# Altium PCB PMSM_G474.PcbDoc (part 1 of 2)
Units mm, origin at the board's own origin, x right, y up, seen from the top; angles counter-clockwise.
Board outline 50 x 80 mm, 4 copper layers (Top Layer, GND, VCC, Bottom Layer), stack 0.603 mm thick; 172 components, 95 nets, 535 pads, 281 vias.
Unrouted connection lines stored in the file: 270.
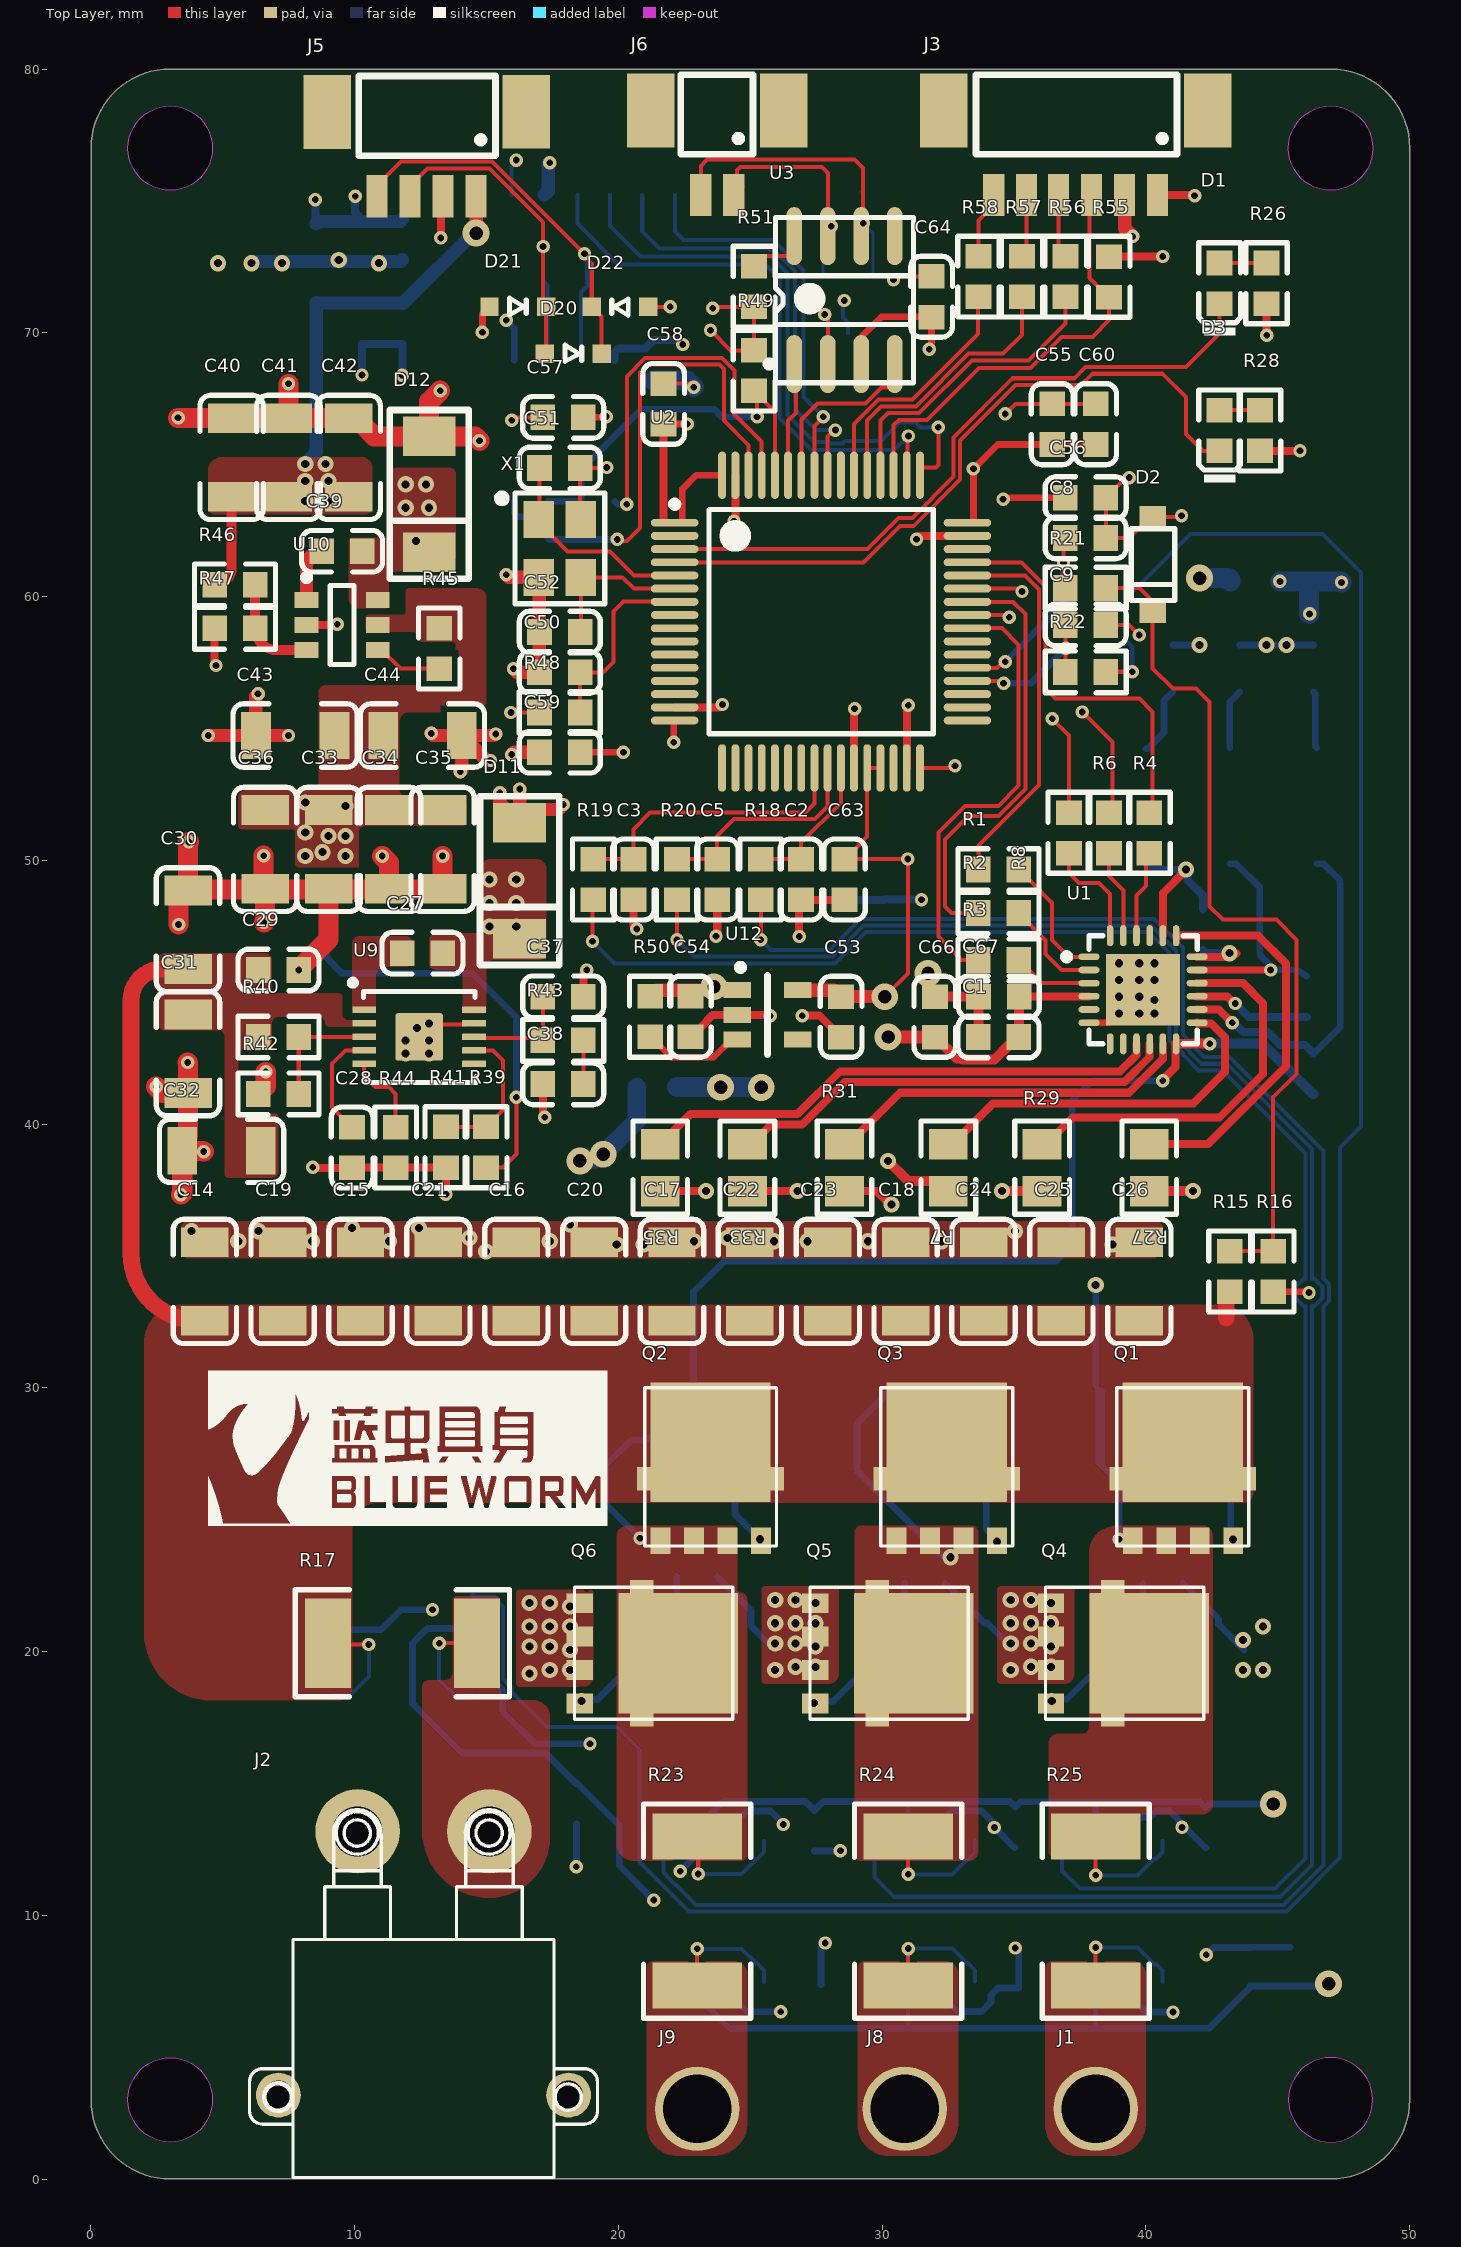
[diagram p0: Top Layer view]
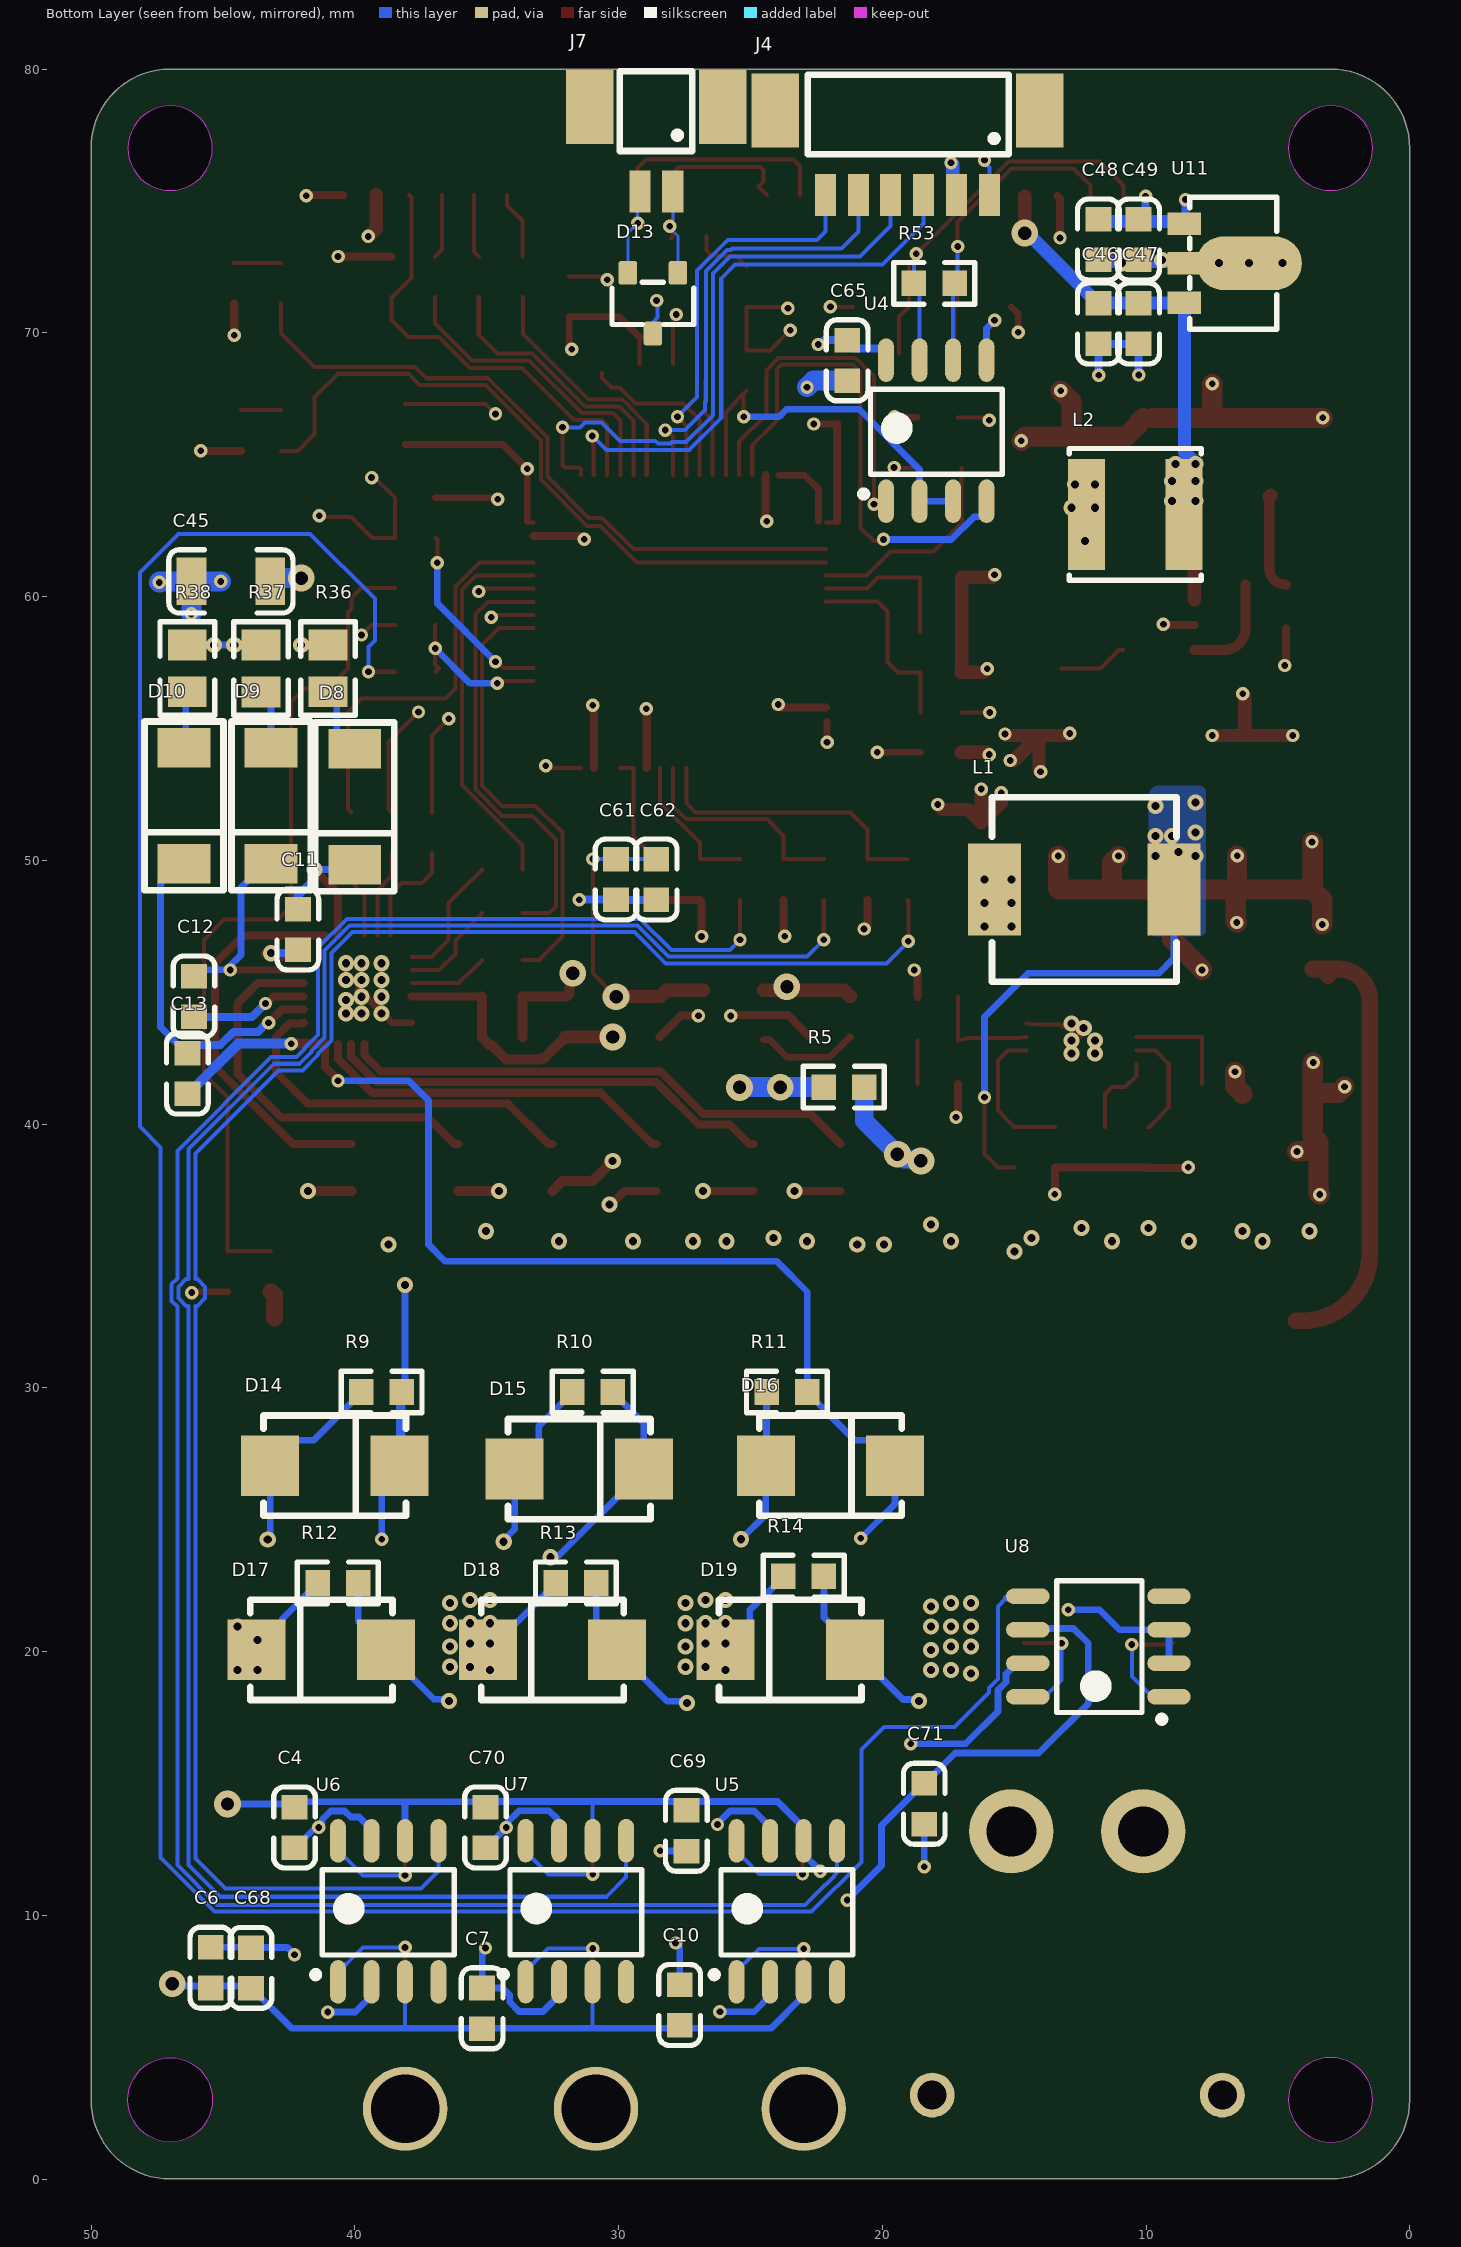
[diagram p1: Bottom Layer view, seen from below]
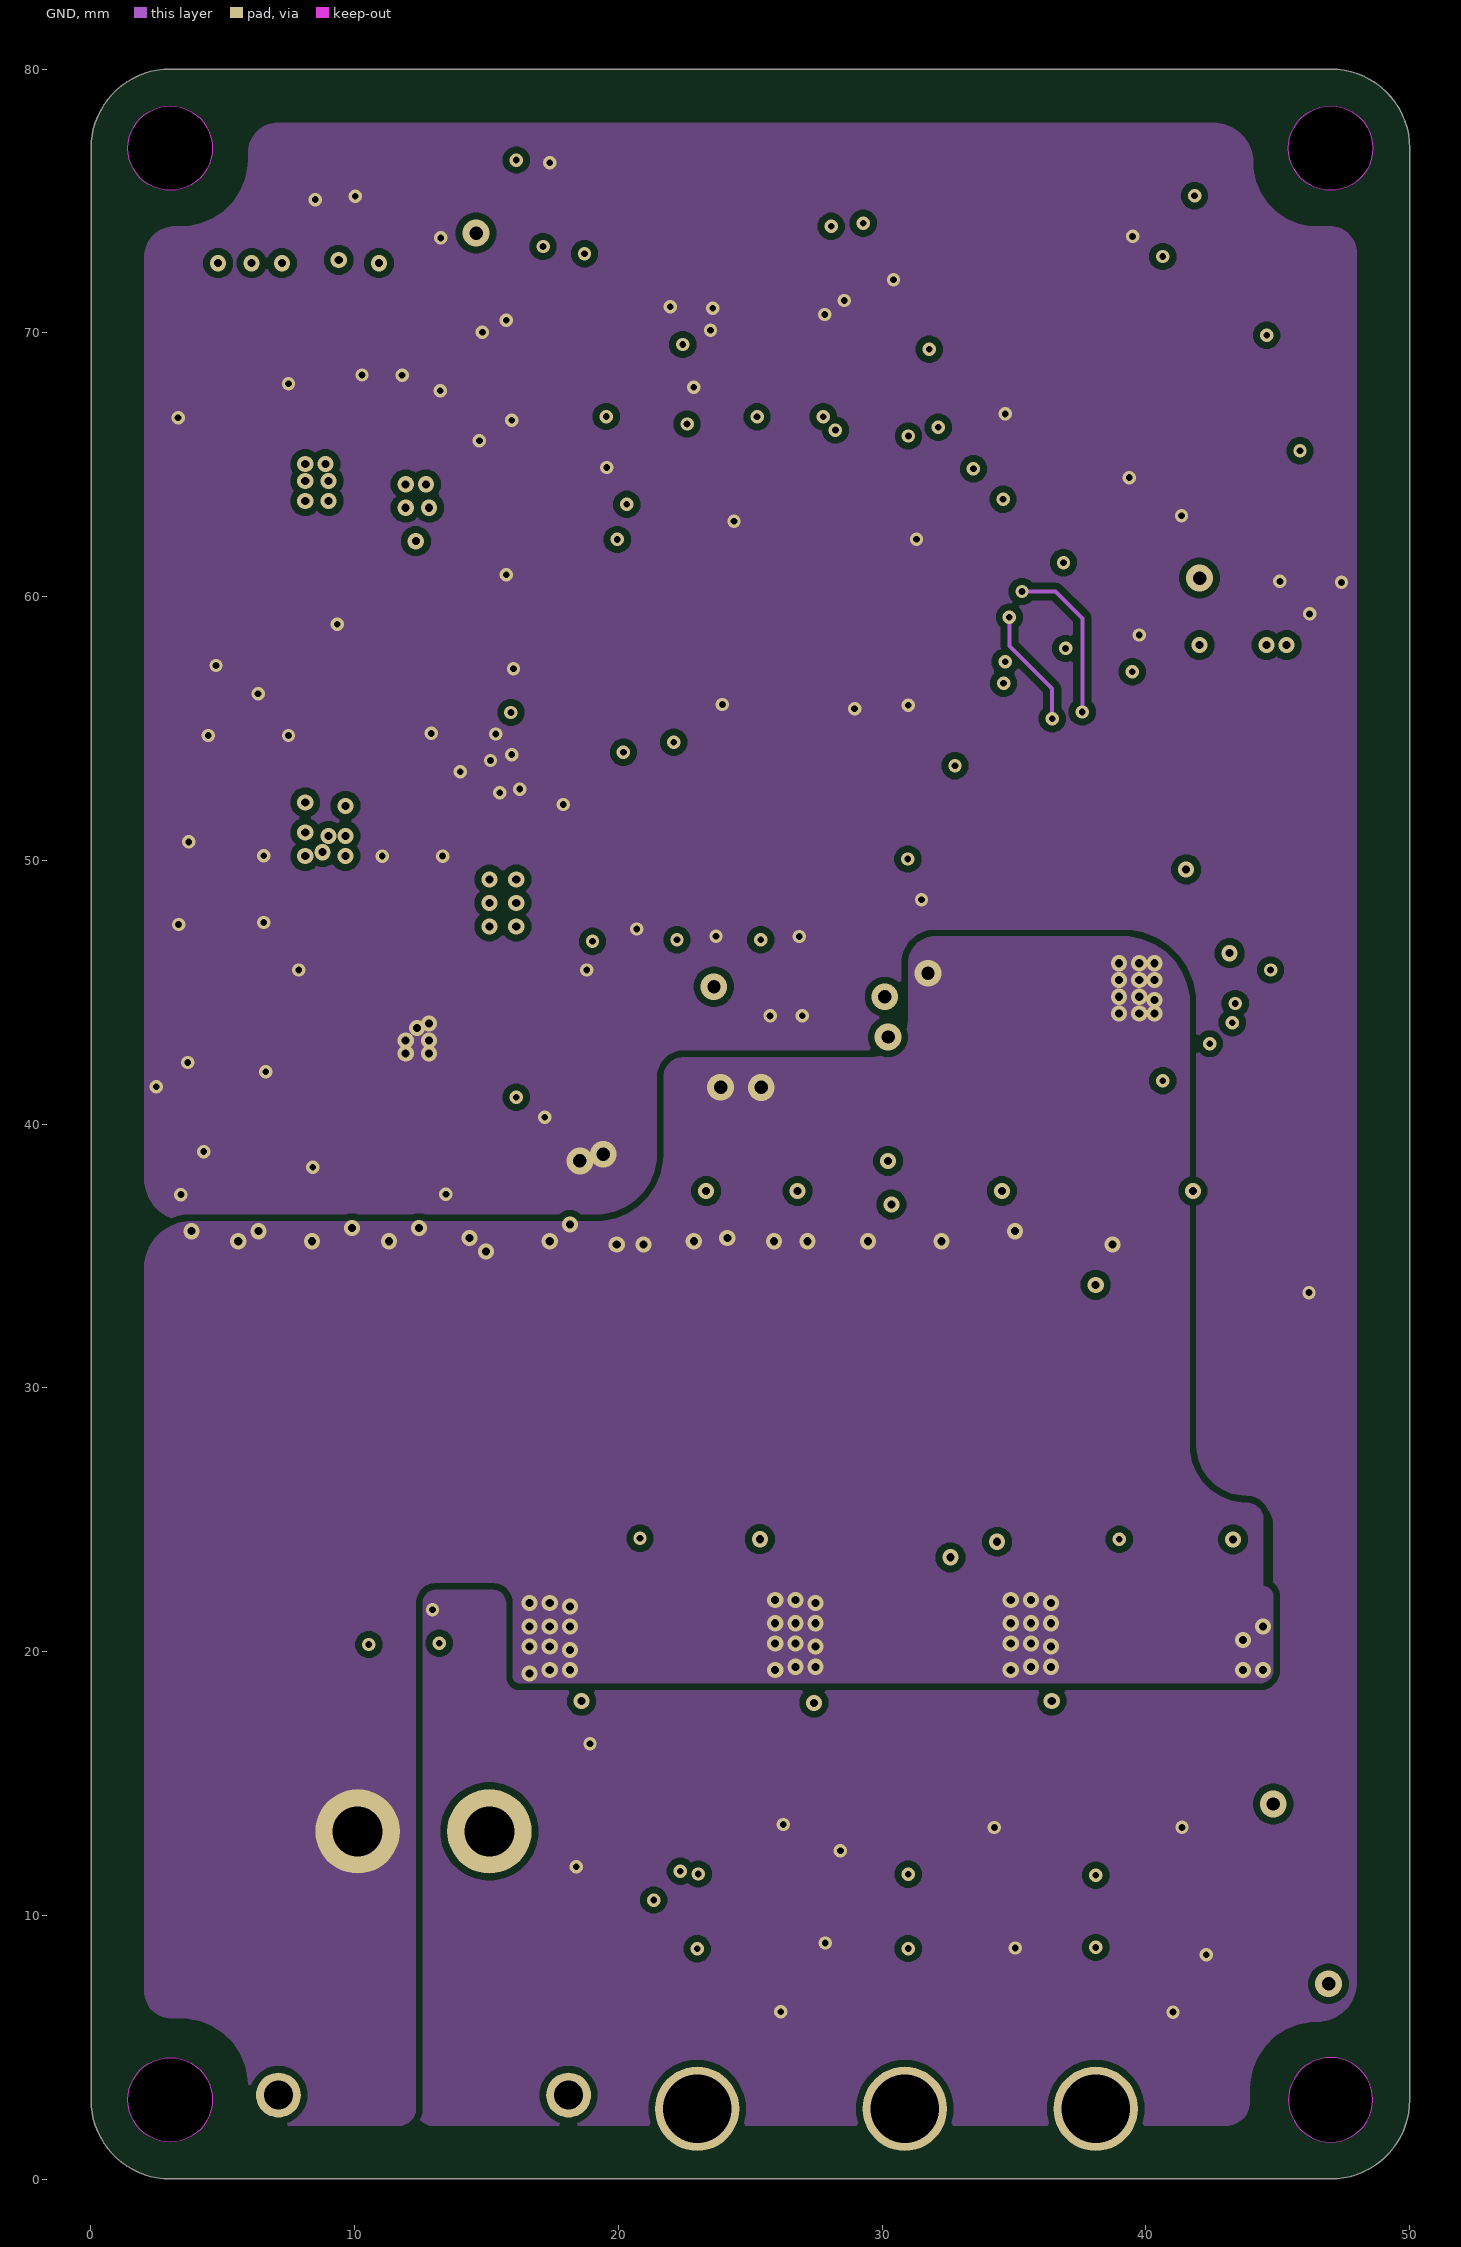
[diagram p2: GND]
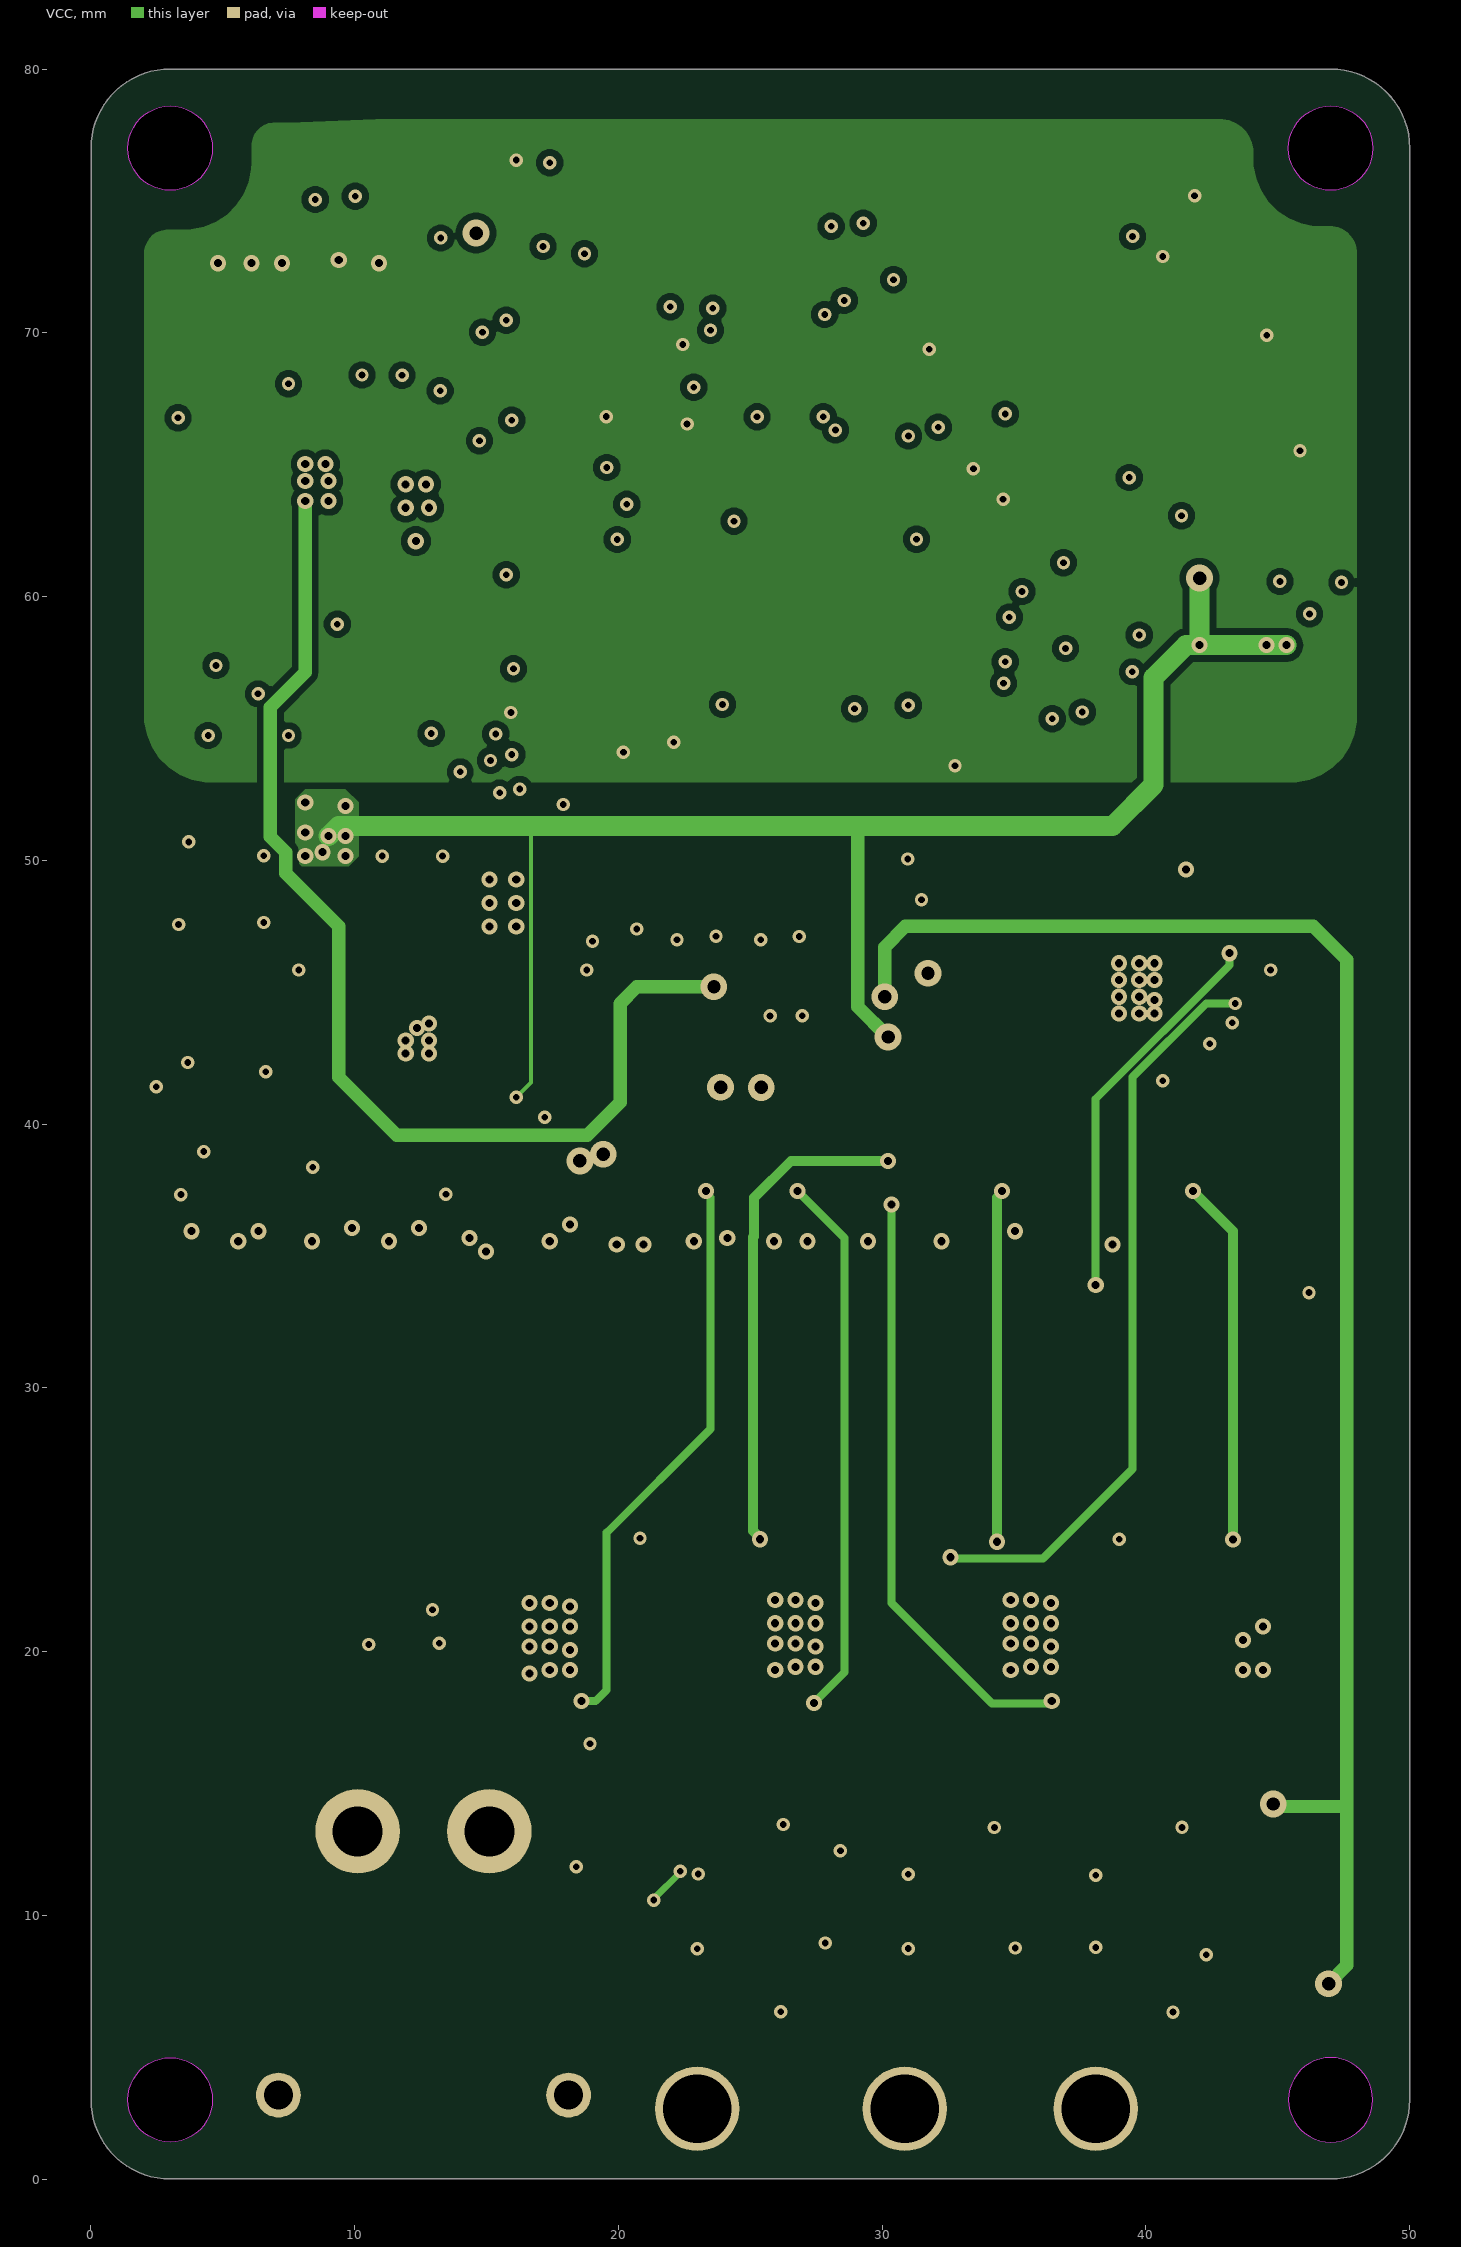
[diagram p3: VCC]
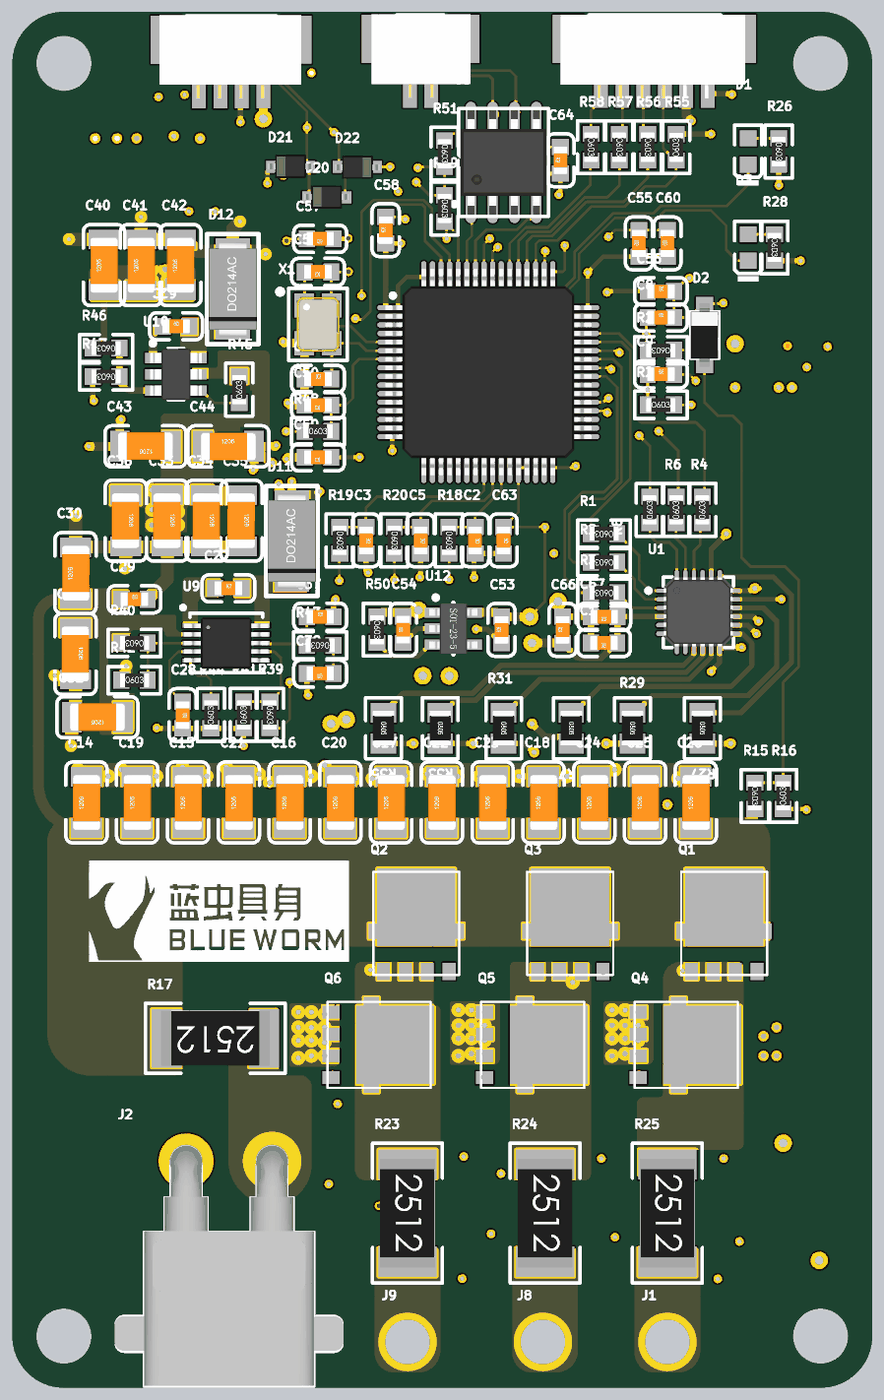
[diagram p5: 3D render of the assembled board from above, using the file's embedded part models]
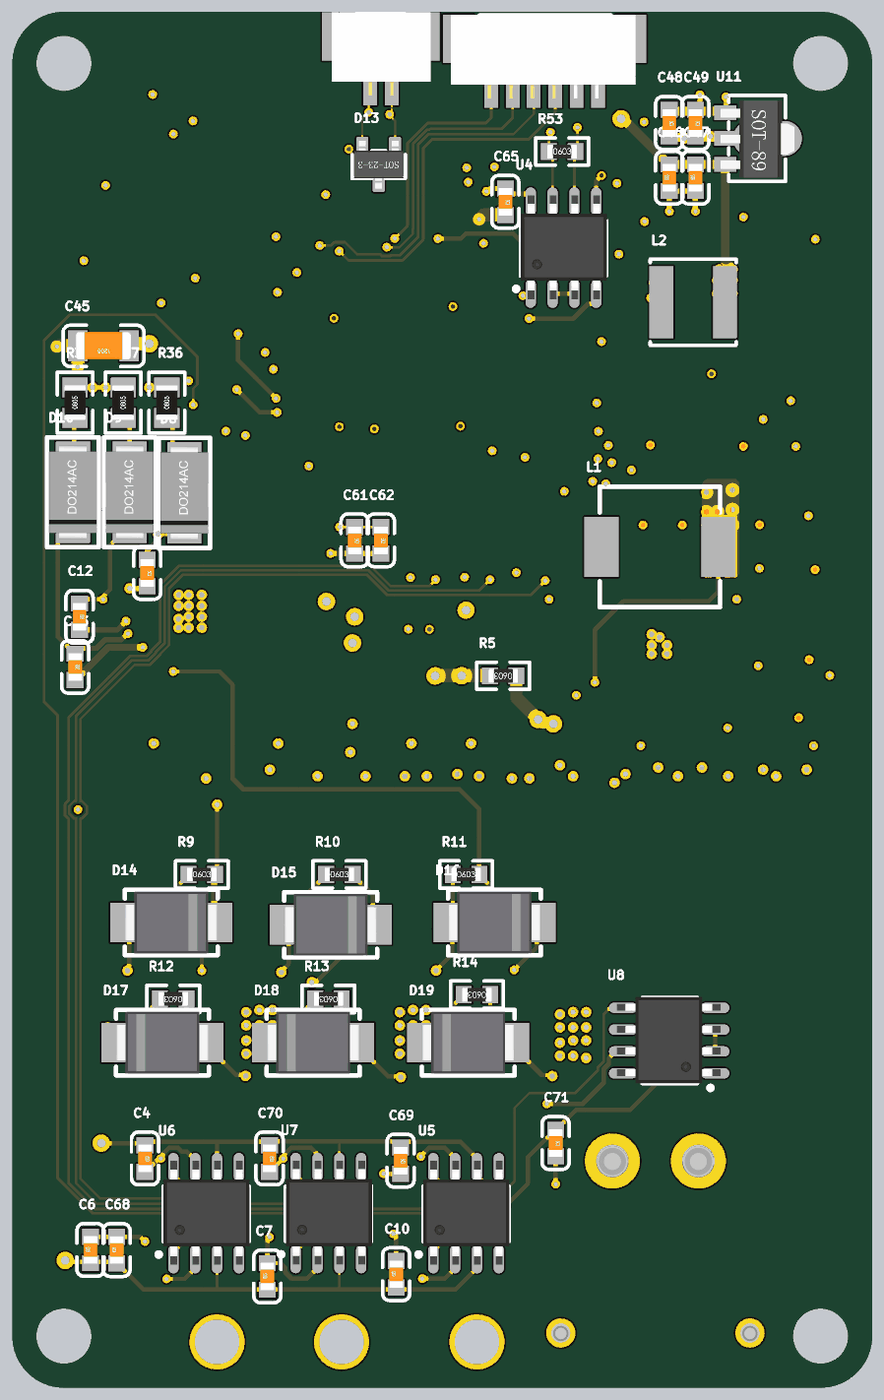
[diagram p6: 3D render of the assembled board from below, using the file's embedded part models]

## Layer stack, top to bottom
Top Solder: solder mask 0.0102, Solder Resist, Dk 3.5
Top Layer: signal copper 0.0356
Dielectric 2: prepreg 0.0711, PP-006, Dk 4.1
GND: signal copper 0.035
Dielectric 1: dielectric 0.32, FR-4, Dk 4.8
VCC: signal copper 0.035
Dielectric 3: prepreg 0.0711, PP-006, Dk 4.1
Bottom Layer: signal copper 0.0356
Bottom Solder: solder mask 0.0102, Solder Resist, Dk 3.5

## Board outline
0.006,3.006 0.006,77.006 cw(c3.006,77.006) 3.006,80.006 47.006,80.006 cw(c47.006,77.006) 50.006,77.006 50.006,3.006 cw(c47.006,3.006) 47.006,0.006 3.006,0.006 cw(c3.006,3.006)
cut-out: 47.006,75.406 cw(c47.006,77.006) 45.406,77.006 cw(c47.006,77.006) 47.006,78.606 cw(c47.006,77.006) 48.606,77.006 cw(c47.006,77.006)
cut-out: 45.406,3.006 ccw(c47.006,3.006) 47.006,1.406 ccw(c47.006,3.006) 48.606,3.006 ccw(c47.006,3.006) 47.006,4.606 ccw(c47.006,3.006)
cut-out: 3.006,75.406 cw(c3.006,77.006) 1.406,77.006 cw(c3.006,77.006) 3.006,78.606 cw(c3.006,77.006) 4.606,77.006 cw(c3.006,77.006)
cut-out: 3.006,1.406 cw(c3.006,3.006) 1.406,3.006 cw(c3.006,3.006) 3.006,4.606 cw(c3.006,3.006) 4.606,3.006 cw(c3.006,3.006)

## Design rules (kind name [scope] priority, off if disabled: settings)
Clearance [All] p1: gap=0.178 ignorepadtopadclearanceinfootprint=TRUE except(0.102: Arc-Arc Arc-Track Track-Track; 0.254: Arc-Poly Track-Poly SMDPad-Poly THPad-Poly Via-Poly Fill-Poly Poly-Poly Poly-Region Poly-Text Poly-Hole)
DiffPairsRouting [All] p1: maxlimit=0.254 minlimit=0.14 mostfreqgap=0.14 toplayer_minwidth=0.114 toplayer_maxwidth=0.508 toplayer_prefwidth=0.114 midlayer1_minwidth=0.114 midlayer1_maxwidth=0.508 midlayer1_prefwidth=0.114 midlayer2_maxgap=0.203 midlayer2_minwidth=0.114 midlayer2_maxwidth=0.114 midlayer2_prefwidth=0.114 bottomlayer_minwidth=0.114 bottomlayer_maxwidth=0.508 bottomlayer_prefwidth=0.114 maxuncoupledlength=12.7
HoleSize [All] p1: absolutevalues=TRUE maxlimit=254 minlimit=0 maxpercent=80.000 minpercent=20.000
HoleToHoleClearance [All] p1: gap=0 allowstackedmicrovias=TRUE
MinimumSolderMaskSliver [All] p1: minsoldermaskwidth=0
PlaneConnect [All] p1: planeconnectstyle=Direct reliefexpansion=0.508 reliefentries=4 reliefconductorwidth=0.254 reliefairgap=0.254
PolygonConnect [All] p1: connectstyle=Direct reliefconductorwidth=0.254 reliefentries=4 polygonreliefangle="90 Angle" airgapwidth=0.254
RoutingVias [All] p1: holewidth=0.203 width=0.406 viastyle="Through Hole" minholewidth=0.203 minwidth=0.406 maxholewidth=33.858 maxwidth=50.8
SilkToSilkClearance [All] p1: silktosilkclearance=0
SilkToSolderMaskClearance [IsPad] p1: minsilkscreentomaskgap=0 clearancetoexposedcopper=TRUE
SolderMaskExpansion [All] p1: expansion=0.102 istentingtop=FALSE
SupplyNets "Schematic Supply Nets_7" [InNet('15V')] p1: voltage=0.000
SupplyNets "Schematic Supply Nets_6" [InNet('5V')] p2: voltage=0.000
SupplyNets "Schematic Supply Nets_5" [InNet('VBAT')] p3: voltage=0.000
SupplyNets "Schematic Supply Nets_4" [InNet('3V3')] p4: voltage=0.000
SupplyNets "Schematic Supply Nets_3" [InNet('GND')] p5: voltage=0.000
SupplyNets "Schematic Supply Nets_2" [InNet('AD_3V3')] p6: voltage=0.000
SupplyNets "Schematic Supply Nets_1" [InNet('VIN')] p7: voltage=0.000
SupplyNets "Schematic Supply Nets" [InNet('PGND')] p8: voltage=0.000
Width [All] p1: maxlimit=104.419 minlimit=0.102 preferedwidth=0.254
23 further rules are at their usual default settings.

## Classes and differential pairs
differential pair MCU_CAN: +MCU_CAN_P -MCU_CAN_N
differential pair CAN: +CAN_P -CAN_N

## Components (designator, comment, footprint, x,y, rotation, side; value= is the part's Value field where it differs from the comment)
C1 "2.2uF" C-0603 34.417,43.307 r180 top
C2 "10nF" C-0603 26.923,49.276 r270 top
C3 "10nF" C-0603 20.574,49.276 r270 top
C4 "100nF" C-0603 42.291,13.335 r270 bottom
C5 "10nF" C-0603 23.749,49.276 r270 top
C6 "100nF" C-0603 45.466,8.017 r90 bottom
C7 "100nF" C-0603 35.179,6.477 r90 bottom
C8 "10nF" C-0603 37.719,62.23 r0 top
C9 "10nF" C-0603 37.719,58.928 r0 top
C10 "100nF" C-0603 27.686,6.604 r90 bottom
C11 "1uF" C-0603 42.164,47.379 r270 bottom
C12 "1uF" C-0603 46.101,44.839 r270 bottom
C13 "1uF" C-0603 46.355,41.918 r270 bottom
C14 "22uF" C-1206 4.318,34.036 r90 top
C15 "22uF" C-1206 10.223,34.036 r90 top
C16 "22uF" C-1206 16.129,34.036 r90 top
C17 "22uF" C-1206 22.034,34.036 r90 top
C18 "22uF" C-1206 30.893,34.036 r90 top
C19 "22uF" C-1206 7.271,34.036 r90 top
C20 "22uF" C-1206 19.082,34.036 r90 top
C21 "22uF" C-1206 13.176,34.036 r90 top
C22 "22uF" C-1206 24.987,34.036 r90 top
C23 "22uF" C-1206 27.94,34.036 r90 top
C24 "22uF" C-1206 33.846,34.036 r90 top
C25 "10uF" C-1206 36.798,34.036 r90 top
C26 "2.2uF" C-1206 39.751,34.036 r90 top
C27 "100nF" C-0603 12.573,46.482 r0 top
C28 "6.8nF" C-0603 9.906,39.116 r270 top
C29 "100nF" C-0603 7.112,45.847 r0 top
C30 "2.2uF" C-1206 3.683,47.371 r90 top
C31 "4.7uF" C-1206 3.683,42.672 r270 top
C32 "4.7uF" C-1206 4.953,38.989 r180 top
C33 "47uF" C-1206 9.017,50.419 r270 top
C34 "47uF" C-1206 11.303,50.419 r270 top
C35 "22uF" C-1206 13.335,50.419 r270 top
C36 "10uF" C-1206 6.604,50.419 r270 top
C37 "6.8pF" C-0603 17.907,44.831 r0 top
C38 "1.2nF" C-0603 17.907,41.529 r180 top
C39 "220nF" C-0603 9.525,61.722 r0 top
C40 "4.7uF" C-1206 5.334,65.278 r90 top
C41 "10uF" C-1206 7.493,65.278 r90 top
C42 "2.2uF" C-1206 9.779,65.278 r90 top
C43 "2.2uF" C-1206 7.747,54.737 r180 top
C44 "10uF" C-1206 12.573,54.737 r0 top
C45 "4.7uF" C-1206 44.704,60.579 r0 bottom
C46 "2.2uF" C-0603 11.811,70.358 r90 bottom
C47 "4.7uF" C-0603 10.287,70.358 r90 bottom
C48 "2.2uF" C-0603 11.811,73.541 r270 bottom
C49 "4.7uF" C-0603 10.287,73.541 r270 bottom
C50 "100nF" C-0603 17.78,57.134 r180 top
C51 "20pF" C-0603 17.78,64.881 r180 top
C52 "20pF" C-0603 17.78,58.658 r0 top
C53 "4.7uF" C-0603 28.448,44.069 r90 top
C54 "4.7uF" C-0603 22.733,44.077 r90 top
C55 "1uF" C-0603 36.449,66.54 r90 top
C56 "100nF" C-0603 37.719,63.754 r0 top
C57 "100nF" C-0603 17.907,66.802 r180 top
C58 "100nF" C-0603 21.717,67.31 r90 top
C59 "100nF" C-0603 17.78,54.102 r180 top
C60 "100nF" C-0603 38.1,66.54 r90 top
C61 "1uF" C-0603 30.099,49.276 r270 bottom
C62 "100nF" C-0603 28.575,49.276 r270 bottom
C63 "100nF" C-0603 28.575,49.276 r270 top
C64 "100nF" C-0603 31.877,71.374 r90 top
C65 "100nF" C-0603 21.336,68.961 r270 bottom
C66 "10uF" C-0603 32.004,44.069 r90 top
C67 "100nF" C-0603 34.425,44.831 r180 top
C68 "10uF" C-0603 43.942,8.009 r90 bottom
C69 "1uF" C-0603 27.432,13.208 r270 bottom
C70 "100nF" C-0603 35.052,13.335 r270 bottom
C71 "100nF" C-0603 18.415,14.232 r270 bottom
D1 "D-LED" D-LED-0603Blue 42.799,71.882 r90 top
D2 "SMF5.0A" D-SOD-123 40.259,61.214 r90 top
D3 "D-LED" D-LED-0603Blue 42.799,66.302 r90 top
D8 "1N4148" DO-214AC(SMA) 40.005,52.03 r90 bottom
D9 "1N4148" DO-214AC(SMA) 43.18,52.071 r90 bottom
D10 "1N4148" DO-214AC(SMA) 46.482,52.071 r90 bottom
D11 "SS310" DO-214AC(SMA) 16.256,49.235 r90 top
D12 "SS210" DO-214AC(SMA) 12.827,63.881 r90 top
D13 "PESD2CAN" SOT-233 28.702,71.12 r0 bottom
D14 "SMBJ15" DO-214AA(SMB) 40.767,27.051 r0 bottom
D15 "SMBJ15" DO-214AA(SMB) 31.496,26.924 r0 bottom
D16 "SMBJ15" DO-214AA(SMB) 21.971,27.051 r0 bottom
D17 "SMBJ15" DO-214AA(SMB) 41.275,20.066 r180 bottom
D18 "SMBJ15" DO-214AA(SMB) 32.512,20.066 r180 bottom
D19 "SMBJ15" DO-214AA(SMB) 23.495,20.066 r180 bottom
D20 "D-TVS-B" D-SOD-323 18.288,69.215 r0 top
D21 "D-TVS-B" D-SOD-323 16.189,70.993 r0 top
D22 "D-TVS-B" D-SOD-323 20.066,70.993 r180 top
J1 "J-1P" PAD-1 38.1,2.667 r0 top
J2 "J-2PIN" J-XT30-2P-F 12.612,8.186 r0 top
J3 "J-6PIN" J-GH-6P 37.338,76.835 r180 top
J4 "J-6PIN" J-GH-6P 19.05,76.835 r0 bottom
J5 "J-4PIN" J-GH-4P 16.304,75.545 r180 top
J6 "J-2PIN" J-GH-2P 23.749,76.835 r180 top
J7 "J-2PIN" J-GH-2P 28.575,76.962 r0 bottom
J8 "J-1P" PAD-1 30.861,2.667 r0 top
J9 "J-1P" PAD-1 22.987,2.667 r0 top
L1 "33uH3.5A" L-SMD-7.0*7.0 12.348,48.895 r180 bottom
L2 "6.8uH" L-SMD-5.0*5.0*4.0 10.414,63.119 r180 bottom
Q1 "NMOS" "SO-8FL  5*6" 41.402,27.005 r0 top
Q2 "NMOS" "SO-8FL  5*6" 23.495,27.005 r0 top
Q3 "NMOS" "SO-8FL  5*6" 32.448,27.005 r0 top
Q4 "NMOS" "SO-8FL  5*6" 39.197,19.939 r270 top
Q5 "NMOS" "SO-8FL  5*6" 30.267,19.939 r270 top
Q6 "NMOS" "SO-8FL  5*6" 21.336,19.939 r270 top
R1 "100R" R-0603 34.417,49.657 r180 top
R2 "100R" R-0603 34.417,48.006 r180 top
R3 "100R" R-0603 34.417,46.228 r180 top
R4 "100R" R-0603 40.132,51.046 r90 top
R5 "0R" R-0603 21.463,41.402 r0 bottom
R6 "100R" R-0603 38.608,51.046 r90 top
R7 "10R" R-0805 32.512,38.354 r270 top
R8 "100R" R-0603 37.084,51.046 r90 top
R9 "10K" R-0603 38.989,29.845 r180 bottom
R10 "10K" R-0603 30.988,29.845 r180 bottom
R11 "10K" R-0603 23.622,29.845 r180 bottom
R12 "10K" R-0603 40.648,22.606 r0 bottom
R13 "10K" R-0603 31.623,22.606 r0 bottom
R14 "10K" R-0603 22.987,22.86 r0 bottom
R15 "100K" R-0603 43.18,34.417 r270 top
R16 "5.1K" R-0603 44.831,34.417 r90 top
R17 "2mR5W" R-2512 11.811,20.32 r180 top
R18 "100R" R-0603 25.399,49.276 r270 top
R19 "100R" R-0603 19.05,49.276 r270 top
R20 "100R" R-0603 22.225,49.276 r270 top
R21 "100R" R-0603 37.719,60.325 r180 top
R22 "100R" R-0603 37.719,57.15 r0 top
R23 "2mR5W" R-2512 22.987,10.16 r270 top
R24 "2mR5W" R-2512 30.988,10.16 r270 top
R25 "2mR5W" R-2512 38.1,10.16 r270 top
R26 "1K" R-0603 44.577,71.882 r270 top
R27 "10R" R-0805 40.132,38.354 r270 top
R28 "1K" R-0603 44.323,66.302 r270 top
R29 "10R" R-0805 36.068,38.354 r270 top
R31 "10R" R-0805 28.575,38.354 r270 top
R33 "10R" R-0805 24.892,38.354 r270 top
R35 "10R" R-0805 21.59,38.354 r270 top
R36 "5R1" R-0805 41.021,57.278 r90 bottom
R37 "5R1" R-0805 43.561,57.277 r90 bottom
R38 "5R1" R-0805 46.355,57.279 r90 bottom
R39 "91K" R-0603 14.986,39.124 r270 top
R40 "105K" R-0603 7.112,43.307 r180 top
R41 "5.1K" R-0603 13.462,39.124 r90 top
R42 "10K" R-0603 7.112,41.148 r0 top
R43 "86.6K" R-0603 17.907,43.18 r180 top
R44 "365K" R-0603 11.557,39.116 r90 top
R45 "1M" R-0603 13.208,58.039 r90 top
R46 "5.1K" R-0603 5.461,60.452 r180 top
R47 "1K" R-0603 5.461,58.801 r180 top
R48 "4.7K" R-0603 17.78,55.61 r0 top
R49 "4.7K" R-0603 25.146,68.572 r270 top
R50 "1K" R-0603 21.209,44.077 r270 top
R51 "4.7K" R-0603 25.146,71.755 r270 top
R53 "120R" R-0603 18.034,71.882 r180 bottom
R55 "4.7K" R-0603 38.608,72.128 r90 top
R56 "22R" R-0603 36.957,72.136 r270 top
R57 "22R" R-0603 35.306,72.136 r270 top
R58 "22R" R-0603 33.655,72.136 r270 top
U1 "FD6228Q" QFN-24-4X4 39.896,45.097 r0 top
U2 "STM32G474RET6" STM-LQFP64_N 27.686,59.055 r0 top
U3 "SN65HVD230" SOp-8 28.575,71.247 r90 top
U4 "CA-IF4820HS" SOIC-8(4mm) 17.956,66.294 r90 bottom
U5 "INA240" SOIC-8(4mm) 23.622,10.152 r90 bottom
U6 "INA240" SOIC-8(4mm) 38.735,10.152 r90 bottom
U7 "INA240" SOIC-8(4mm) 31.623,10.16 r90 bottom
U8 "INA240" SOIC-8(4mm) 11.811,20.193 r0 bottom
U9 "TPS54260" MSOP-10 12.446,43.307 r0 top
U10 "ME3116" SOT-236 9.525,58.928 r0 top
U11 "AMS1117" SOT-89 7.322,72.644 r270 bottom
U12 "SPX3819" SOT-235 25.654,44.145 r0 top
X1 "8M" X-SMD-3225-4P 17.78,61.833 r270 top

## Footprints (in the part's own frame and the unit in brackets; to place one, negate y for a bottom-side part, rotate by r counter-clockwise, add the part's x,y. Pads: shape width x height; smd on the part's side, far side on the other; paste and mask are expansions set on the pad)
C-0603 [mm]
  rect 0.93x0.98 smd: 1(-0.77,0) 2(0.77,0)
  silkscreen extent -1.53,-0.79 1.54,0.79, body extent -0.8,-0.4 0.8,0.4, height 0.3
C-1206 [mm]
  rect 1.13x1.8 smd: 1(-1.49,0) 2(1.49,0)
  silkscreen extent -2.36,-1.2 2.35,1.2, body extent -1.6,-0.81 1.6,0.79, height 1
D-LED-0603Blue [mm]
  rect 0.93x0.98 smd: 1(0.77,0) 2(-0.77,0)
  silkscreen extent -1.97,-0.79 1.54,0.79, body extent -0.8,-0.4 0.8,0.4, height 0.6
D-SOD-123 [mm]
  rect 0.8x1 smd: 1(1.816,0) 2(-1.816,0)
  silkscreen extent -1.36,-0.84 1.36,0.81, body extent -1.85,-0.8 1.85,0.8, height 1.27
D-SOD-323 [mm]
  rect 0.7x0.7 smd: 1(-1.075,0) 2(1.075,0)
  silkscreen extent -0.31,-0.3 0.32,0.33, body extent -1.31,-0.65 1.29,0.7, height 1.1
DO-214AA(SMB) [mm]
  rect 2.2x2.3 smd: 1(2.45,0) 2(-2.45,0)
  silkscreen extent -2.7,-1.9 2.7,1.9, body extent -2.7,-1.8 2.7,1.8, height 2.35
DO-214AC(SMA) [mm]
  rect 1.5x2 smd: 1(2.2,0) 2(-2.2,0)
  silkscreen extent -3.2,-1.5 3.2,1.5, body extent -2.74,-1.4 2.74,1.4, height 2.41
J-GH-2P [mm]
  rect 1.8x2.8 smd: 0(-2.524,-1.601) 0(2.525,-1.601)
  rect 0.8x1.6 smd: 1(-0.626,1.601) 2(0.624,1.601)
  silkscreen extent -1.36,-2.96 1.38,0.06, body extent -2.89,-3.03 2.86,1.82, height 4.25
J-GH-4P [mm]
  rect 1.8x2.8 smd: 0(-0.199,-2.841) 0(7.349,-2.839)
  rect 0.8x1.6 smd: 1(1.699,0.361) 2(2.949,0.361) 3(4.199,0.361) 4(5.449,0.361)
  silkscreen extent 0.97,-4.2 6.15,-1.18, body extent -0.5,-4.27 7.75,0.58, height 4.25
J-GH-6P [mm]
  rect 1.8x2.8 smd: 0(-5.006,-1.601) 0(5.006,-1.599)
  rect 0.8x1.6 smd: 1(-3.108,1.601) 2(-1.858,1.601) 3(-0.608,1.601) 4(0.642,1.601) 5(1.856,1.601) 6(3.106,1.601)
  silkscreen extent -3.84,-2.96 3.78,0.06, body extent -5.29,-3 5.46,1.85, height 4.45
J-XT30-2P-F [mm]
  round 1.7 hole 1.1: 0(-5.5,-5) 0(5.5,-5)
  round 3.2 hole 1.9: 1(2.5,5) 2(-2.5,5)
  silkscreen extent -6.6,-8.12 6.6,5.82, body extent -6.65,-8.08 6.65,5.87, height 5.35
L-SMD-5.0*5.0*4.0 [mm]
  rect 1.4x4.2 smd: 1(-1.85,0) 2(1.85,0)
  silkscreen extent -2.5,-2.5 2.5,2.5, body extent -2.13,-2.2 2.24,2.31, height 3
L-SMD-7.0*7.0 [mm]
  rect 2x3.5 smd: 1(-3.4,0) 2(3.4,0)
  silkscreen extent -3.5,-3.5 3.5,3.5, body extent -3.5,-3.5 3.5,3.5, height 4.5
MSOP-10 [mm]
  rrect10% 1.8x1.8 smd: 0(0,0)
  rrect10% 0.9x0.25 smd: 1(-2.083,1.024) 2(-2.083,0.512) 3(-2.083,0) 4(-2.083,-0.512) 5(-2.083,-1.024) 6(2.083,-1.024) 7(2.083,-0.512) 8(2.083,0) 9(2.083,0.512) 10(2.083,1.024)
  silkscreen extent -2.62,-1.73 2.17,2.16, body extent -2.45,-1.5 2.45,1.5, height 1.15
PAD-1 [mm]
  round 3.2 hole 2.6: 1(0,0)
QFN-24-4X4 [mm]
  oval 0.8x0.25 smd: 1(-2.05,1.25) 2(-2.05,0.75) 3(-2.05,0.25) 4(-2.05,-0.25) 5(-2.05,-0.75) 6(-2.05,-1.25) 13(2.05,-1.25) 14(2.05,-0.75) 15(2.05,-0.25) 16(2.05,0.25) 17(2.05,0.75) 18(2.05,1.25)
  oval 0.25x0.8 smd: 7(-1.25,-2.05) 8(-0.75,-2.05) 9(-0.25,-2.05) 10(0.25,-2.05) 11(0.75,-2.05) 12(1.25,-2.05) 19(1.25,2.05) 20(0.75,2.05) 21(0.25,2.05) 22(-0.25,2.05) 23(-0.75,2.05) 24(-1.25,2.05)
  rect 2.8x2.7 smd: 25(0,0)
  silkscreen extent -3.02,-2.05 2.05,2.05, body extent -2,-1.98 2,2.02, height 1
R-0603 [mm]
  rect 0.93x0.98 smd: 1(-0.77,0) 2(0.77,0)
  silkscreen extent -1.53,-0.79 1.54,0.79, body extent -0.85,-0.4 0.85,0.4, height 0.56
R-0805 [mm]
  rect 1.16x1.47 smd: 1(-0.89,0) 2(0.89,0)
  silkscreen extent -1.77,-1.04 1.77,1.03, body extent -1,-0.63 1,0.63, height 0.49
R-2512 [mm]
  rect 1.75x3.4 smd: 1(-2.825,0) 2(2.825,0)
  silkscreen extent -4.06,-2.03 4.06,2.03, body extent -3.16,-1.6 3.16,1.6, height 0.62
"SO-8FL  5*6" [mm]
  rect 0.75x1 smd: 1(-1.9,-2.795) 1(-0.63,-2.795) 1(0.64,-2.795) 4(1.91,-2.795)
  rrect1% 0.52x0.905 smd: 5(-2.52,-0.45) 5(2.52,-0.45)
  rrect1% 4.56x4.53 smd: 5(0,0.935)
  silkscreen extent -2.5,-3 2.5,3, body extent -2.5,-3 2.5,3, height 0.25
SOIC-8(4mm) [mm] "SOIC, 8-Leads, Body 5.0x4.0mm (max), Pitch 1.27mm, IPC Medium Density"
  oval 1.65x0.6 smd: 1(-2.675,1.905) 2(-2.675,0.635) 3(-2.675,-0.635) 4(-2.675,-1.905) 5(2.675,-1.905) 6(2.675,-0.635) 7(2.675,0.635) 8(2.675,1.905)
  silkscreen extent -2.52,-2.5 1.57,2.88, body extent -3,-2.54 3.05,2.48, height 1.6
SOp-8 [mm] "SOP, 8-Leads, Body 5.0x4.0mm (max), Pitch 1.27mm, IPC Medium Density"
  oval 2.2x0.6 smd: 1(-2.425,1.905) 2(-2.425,0.635) 3(-2.425,-0.635) 4(-2.425,-1.905) 5(2.425,-1.905) 6(2.425,-0.635) 7(2.425,0.635) 8(2.425,1.905)
  silkscreen extent -3.13,-2.62 3.13,2.98, body extent -3.02,-2.51 3.02,2.51, height 1.6
SOT-89 [mil]
  rect 34x50 smd: 1(-59.05,-48.27) 2(0,-48.27) 3(59.06,-48.27)
  oval 80x157.48 smd: 4(0,48.27)
  silkscreen extent -98,-40 98,90, body extent -87,-59 90,110, height 59
SOT-233 [mm]
  rrect25% 0.7x0.9 smd: 1(-0.95,-1.16) 2(0.95,-1.16) 3(0,1.14)
  silkscreen extent -1.55,-0.81 1.55,0.8, body extent -1.45,-1.4 1.45,1.4, height 1.2
SOT-235 [mm] "SOT23, 5-Leads, Body 3.0x2.6mm (max), Pitch 0.95mm, IPC Medium Density"
  rect 1.05x0.6 smd: 1(-1.143,0.94) 2(-1.143,0) 3(-1.143,-0.94) 4(1.143,-0.94) 5(1.143,0.94)
  silkscreen extent -1.15,-1.5 0,1.92, body extent -1.4,-1.45 1.4,1.45, height 1.2
SOT-236 [mm]
  rect 0.9x0.6 smd: 1(-1.35,0.95) 2(-1.35,0) 3(-1.35,-0.95) 4(1.35,-0.95) 5(1.35,0) 6(1.35,0.95)
  silkscreen extent -1.47,-1.5 0.45,1.92, body extent -1.5,-1.5 1.5,1.5, height 1
STM-LQFP64_N [mm] "Thin QFP, 64-Leads, Body 10x10mm, Pitch 0.5mm, IPC Medium Density"
  oval 1.8x0.3 smd: 1(-5.55,3.75) 2(-5.55,3.25) 3(-5.55,2.75) 4(-5.55,2.25) 5(-5.55,1.75) 6(-5.55,1.25) 7(-5.55,0.75) 8(-5.55,0.25) 9(-5.55,-0.25) 10(-5.55,-0.75) 11(-5.55,-1.25) 12(-5.55,-1.75) 13(-5.55,-2.25) 14(-5.55,-2.75) 15(-5.55,-3.25) 16(-5.55,-3.75) 33(5.55,-3.75) 34(5.55,-3.25) 35(5.55,-2.75) 36(5.55,-2.25) 37(5.55,-1.75) 38(5.55,-1.25) 39(5.55,-0.75) 40(5.55,-0.25) 41(5.55,0.25) 42(5.55,0.75) 43(5.55,1.25) 44(5.55,1.75) 45(5.55,2.25) 46(5.55,2.75) 47(5.55,3.25) 48(5.55,3.75)
  oval 0.3x1.8 smd: 17(-3.75,-5.55) 18(-3.25,-5.55) 19(-2.75,-5.55) 20(-2.25,-5.55) 21(-1.75,-5.55) 22(-1.25,-5.55) 23(-0.75,-5.55) 24(-0.25,-5.55) 25(0.25,-5.55) 26(0.75,-5.55) 27(1.25,-5.55) 28(1.75,-5.55) 29(2.25,-5.55) 30(2.75,-5.55) 31(3.25,-5.55) 32(3.75,-5.55) 49(3.75,5.55) 50(3.25,5.55) 51(2.75,5.55) 52(2.25,5.55) 53(1.75,5.55) 54(1.25,5.55) 55(0.75,5.55) 56(0.25,5.55) 57(-0.25,5.55) 58(-0.75,5.55) 59(-1.25,5.55) 60(-1.75,5.55) 61(-2.25,5.55) 62(-2.75,5.55) 63(-3.25,5.55) 64(-3.75,5.55)
  silkscreen extent -5.67,-4.25 4.25,4.57, body extent -6,-6 6,6, height 1.6
X-SMD-3225-4P [mm]
  rect 1.4x1.15 smd: 1(-1.1,-0.8) 2(1.1,-0.8) 3(1.1,0.8) 4(-1.1,0.8)
  silkscreen extent -2.1,-2.35 2.1,1.7, body extent -1.6,-1.24 1.6,1.26, height 0.61

## Part data
C1 C2 C3 C4 C5 C6 C7 C8 C9 C10 C11 C12 C13 C14 C15 C16 C17 C18 C19 C20 C21 C22 C23 C24 C25 C26 C27 C28 C29 C30 C31 C32 C33 C34 C35 C36 C37 C38 C39 C40 C41 C42 C43 C44 C45 C46 C47 C48 C49 C50 C51 C52 C53 C54 C55 C56 C57 C58 C59 C60 C61 C62 C63 C64 C65 C66 C67 C68 C69 C70 C71: library part C, "Non Polarised"
D1 D3: "LED"
D2 D14 D15 D16 D17 D18 D19: library part D-TVS-U, "单向TVS"
D8 D9 D10 D11 D12: library part D-Schottky, "Schottky"
D13: library part D-ESD, "组合ESD二极管"
D20 D21 D22: "双向TVS"
L1 L2: library part L-SMD, "Inductor"
R1 R2 R3 R4 R5 R6 R7 R8 R9 R10 R11 R12 R13 R14 R15 R16 R17 R18 R19 R20 R21 R22 R23 R24 R25 R26 R27 R28 R29 R31 R33 R35 R36 R37 R38 R39 R40 R41 R42 R43 R44 R45 R46 R47 R48 R49 R50 R51 R53 R55 R56 R57 R58: library part R, "Resistor"
U1: "三相栅极驱动器"
U2: "ARM Cortex-M4 32-bit MCU+FPU, 512 kB Flash, 128 kB Internal RAM, 51 I/Os, 64-pin UFQFPN, -40 to 85 degC, Tray"
U4: "485 半双工 非隔离 ±15V共模 50M"
U5 U6 U7 U8: "具有PWM抑制功能的电流检测IC"
U9: "3.5V-60V 2A Step-Down DCDC Convertor"
U10: "DC-DC BUCK CONVERTER 40V VINmax 1A IOUTmax"
U11 U12: "LDO"
X1: library part Crystal-4p, "Crystal Oscillator"
J5: LatestRevisionDate=17-Jul-2002, LatestRevisionNote="Re-released for DXP Platform.", Publisher="Altium Limited"

## Via types
v1: diameter 0.508, hole 0.254, Top Layer to Bottom Layer, 141 vias
v2: diameter 0.61, hole 0.305, Top Layer to Bottom Layer, 128 vias
v3: diameter 1.016, hole 0.508, Top Layer to Bottom Layer, 11 vias
v4: diameter 1, hole 0.5, Top Layer to Bottom Layer, 1 vias

## Nets (pads, with @x,y where several pads share a name; then routed paths per layer and width w, separated by ;. In a path a pad name is that pad's centre, name@x,y a point inside that pad or via, vN(x,y) a via of type N, cw(c..) or ccw(c..) an arc to the next point about the centre after c; other vN are vias at no path point)
3V3: C48.2 C49.2 C55.1 C56.1 C57.1 C58.1 C59.1 C60.1 C64.1 C65.1 J3.1 J4.1 R26.2 R28.2 R48.1 R55.2 U2.1 U2.16 U2.32 U2.48 U2.64 U3.3 U4.8 U11.2 U11.4 | length 45.2
  Top Layer w0.152: v1(15.927,55.61) R48.1@17.01,55.61 ; v1@19.515,66.802 v1(19.543,66.83) ; U2.1@21.717,62.873 21.785,62.805 U2.1@22.136,62.805 ; C58.1@21.717,66.54 C58.1@21.725,66.548 ; U2.16@22.098,55.267 U2.16@22.136,55.305 ; U2.1@22.411,62.859 U2.1@22.425,62.873 ; U3.3@29.21,68.822 U3.3@29.21,69.85 ; U2.32@31.436,53.505 32.677,53.505 v1(32.766,53.594) ; v1(31.785,69.38) v1@31.877,69.472 ; C64.1@31.869,70.612 C64.1@31.877,70.604 ; U2.48@33.236,62.805 33.394,62.805 U2.48@33.462,62.873 ; v1(34.588,63.698) v1@34.644,63.754
  Top Layer w0.254: C59.1@18.55,54.102 v1(20.193,54.102) ; C57.1@18.677,66.802 v1@19.515,66.802 ; C58.1@21.725,66.548 v1(22.606,66.548) ; v1(22.098,54.483) U2.16@22.098,55.267 ; U2.1@22.425,62.873 22.425,64.081 22.949,64.605 U2.64@23.936,64.605 ; U3.3@29.21,69.85 29.972,70.612 C64.1@31.869,70.612 ; v1@31.877,69.472 C64.1@31.877,70.604 ; U2.48@33.462,62.873 v1(33.462,64.847) 34.385,65.77 C55.1@36.449,65.77 C60.1@38.1,65.77 ; v1@34.644,63.754 C56.1@36.949,63.754
  Top Layer w0.305: U2.1@21.717,62.873 C58.1@21.717,66.54 ; R55.2@38.608,72.898 v1(40.64,72.898) ; J3.1@40.446,75.234 41.813,75.234 v1(41.848,75.199) ; R28.2@44.323,65.532 v1(45.847,65.532) ; R26.2@44.577,71.112 44.577,69.914 v1(44.58,69.912)
  Bottom Layer w0.152: J4.1@15.942,75.234 15.942,76.271 16.129,76.458 v1(16.129,76.554)
  Bottom Layer w0.305: U4.8@19.861,68.969 19.861,69.282 19.997,69.418 21.023,69.418 C65.1@21.336,69.731 22.201,69.731 22.405,69.527 v1(22.439,69.561)
  Bottom Layer w0.508: v2(6.096,72.644) 6.159,72.707 11.747,72.707 C48.2@11.811,72.771
  other v2: 4.826,72.644 7.239,72.644 10.922,72.644 9.398,72.771
5V: C40.1 C41.1 C42.1 C46.2 C47.2 C54.2 J5.1 L2.2 R46.2 R50.1 U11.3 U12.1 | length 65.2
  Top Layer w0.381: R46.2@4.691,60.452 ccw(c4.691,61.095) 5.334,61.095 C40.1@5.334,63.788
  Top Layer w0.508: C40.1@5.274,63.848 C40.1@5.334,63.788 ; v3(14.605,73.787) J5.1@14.605,75.184 ; R50.1@21.209,44.847 21.234,44.847 21.472,45.085 U12.1@24.511,45.085
  VCC w0.508: v2(8.128,63.627) 8.128,57.133 6.807,55.812 6.807,50.894 7.391,50.31 7.391,49.509 9.398,47.502 9.398,41.783 11.6,39.581 18.821,39.581 20.066,40.826 20.066,44.577 20.701,45.212 v4(23.622,45.212)
  Bottom Layer w0.508: v2(8.128,65.024) 8.128,65.051 8.548,65.471 U11.3@8.548,71.144 8.556,71.136 11.803,71.136 C46.2@11.811,71.128 11.836,71.128 14.495,73.787 v3(14.605,73.787)
  other v2: 9.017,63.627 8.128,64.389 9.017,64.389 8.89,65.024
15V: C1.1 C33.1 C34.1 C35.1 C36.1 C43.1 C44.1 C45.1 C66.1 C67.1 L1.2 R36.2 R37.2 R38.2 R39.2 R45.2 U1.4 U10.5 | length 95.6
  Top Layer w0.152: R39.2@14.986,38.354 15.621,38.354 16.129,38.862 v1(16.129,41.021)
  Top Layer w0.305: C67.1@35.195,44.831 35.211,44.847 U1.4@37.846,44.847
  Top Layer w0.381: C66.1@32.029,43.299 32.847,42.481 32.997,42.481 33.029,42.449 34.265,42.449 34.823,43.007 34.913,43.007 35.187,43.282 C1.1@35.187,43.307 35.191,43.311 35.191,44.827 C67.1@35.195,44.831
  Top Layer w0.508: v3(30.226,43.307) 31.996,43.307 C66.1@32.004,43.299
  VCC w0.152: v1(16.129,41.021) 16.688,41.58 16.688,51.257 16.637,51.308
  VCC w0.508: 29.083,51.308 29.083,44.45 v3(30.226,43.307)
  VCC w0.762: v2(9.017,50.927) 9.398,51.308 9.652,51.308 16.637,51.308 29.083,51.308 38.735,51.308 40.298,52.871 40.298,56.935 41.529,58.166 v2(42.037,58.166) ; v3(42.037,60.706) v2(42.037,58.166) ; v2(45.339,58.166) v2(44.577,58.166) v2(42.037,58.166)
  Bottom Layer w0.254: L1.2@8.948,48.895 8.948,46.297 9.525,45.72 14.478,45.72 16.129,44.069 v1(16.129,41.021) ; R36.2@41.021,58.168 41.023,58.166 v2(42.037,58.166) ; C45.1@43.087,60.706 C45.1@43.214,60.579 ; R37.2@43.563,58.166 v2(44.577,58.166) v2(45.339,58.166) 46.352,58.166 R38.2@46.355,58.169
  Bottom Layer w0.762: v3(42.037,60.706) 43.087,60.706 cw(c43.087,60.579) C45.1@43.214,60.579
  other v2: 8.128,50.165 9.652,50.165 8.782,50.311 9.652,50.927 8.128,51.054 9.652,52.07 8.128,52.197
AD_3V3: C4.1 C6.1 C7.1 C10.1 C53.2 C61.1 C62.1 C63.1 C68.1 C69.1 C70.1 C71.1 U2.28 U2.29 U5.3 U5.6 U6.3 U6.6 U7.3 U7.6 U8.6 U12.5 | length 156.2
  Top Layer w0.152: C63.1@28.575,50.046 C63.1@28.6,50.046 ; U2.29@29.936,53.505 U2.28@29.436,53.505 29.436,50.907 28.989,50.46 28.989,50.435 C63.1@28.6,50.046 ; v3(30.099,44.831) 30.978,45.71 v1(30.978,50.053) 28.607,50.053 C63.1@28.6,50.046
  Top Layer w0.508: U12.5@26.797,45.085 28.177,45.085 28.423,44.839 C53.2@28.448,44.839 30.091,44.839 v3(30.099,44.831)
  VCC w0.254: v1(21.337,10.58) 21.337,10.622 22.352,11.637 v1(22.352,11.678)
  VCC w0.508: v3(30.099,44.831) 30.099,46.712 30.885,47.498 46.355,47.498 47.625,46.228 47.625,14.127 ; v3(44.831,14.224) 44.928,14.127 47.625,14.127 ; v3(46.929,7.407) 47.625,8.103 47.625,14.127
  Bottom Layer w0.152: U5.3@22.987,6.952 U5.3@22.987,7.477 ; C62.1@28.575,50.046 28.582,50.053 v1(30.978,50.053) ; 30.988,5.715 U7.3@30.988,7.485 ; U7.6@30.988,12.835 30.988,14.32 ; 38.1,5.715 U6.3@38.1,7.477
  Bottom Layer w0.254: U8.6@14.486,20.828 14.435,20.879 12.751,20.879 12.192,20.32 12.192,18.034 14.072,16.154 17.238,16.154 18.39,15.002 C71.1@18.415,15.002 18.44,15.002 20.033,13.409 20.033,11.884 v1(21.337,10.58) ; v1(22.352,11.678) 22.352,11.683 22.987,12.318 U5.6@22.987,12.827 ; U5.3@22.987,6.952 24.224,5.715 30.988,5.715 42.393,5.715 43.917,7.239 C68.1@43.942,7.239 ; U5.6@22.987,13.33 23.973,14.316 27.094,14.316 C69.1@27.432,13.978 27.77,14.316 27.939,14.316 27.944,14.32 30.988,14.32 34.837,14.32 C70.1@35.052,14.105 35.259,14.312 38.1,14.312 ; U6.6@38.1,12.827 38.1,14.312 ; C4.1@42.27,14.084 42.041,14.312 38.1,14.312 ; C4.1@42.291,14.105 42.41,14.224 v3(44.831,14.224) ; C68.1@43.942,7.319 46.841,7.319 v3(46.929,7.407)
CAN_N: D13.2 J6.2 J7.2 U3.6 | length 12.9
  Top Layer w0.152: J6.2@23.125,75.234 23.125,76.338 23.368,76.581 23.935,76.581 28.956,76.581 29.283,76.254 v1(29.283,74.163) U3.6@29.337,74.109
  Bottom Layer w0.114: J7.2@29.199,75.361 29.283,75.277 v1(29.283,74.163) 29.652,73.794 D13.2@29.652,72.28
CAN_P: D13.1 J6.1 J7.1 U3.7 | length 10.7
  Top Layer w0.152: J6.1@24.375,75.234 24.699,75.558 24.507,75.749 24.507,76.173 24.623,76.289 27.724,76.289 27.94,76.073 U3.7@27.94,73.914 ; U3.7@28.026,73.586 U3.7@27.94,73.672 U3.7@27.94,73.914 ; v1(28.067,74.041) U3.7@27.94,73.914
  Bottom Layer w0.114: D13.1@27.752,72.28 27.752,73.673 28.067,73.988 28.067,74.148 27.949,74.265 J7.1@27.949,75.361
CURR_BUS: C9.1 R22.1 U2.36 | length 6.2
  Top Layer w0.152: U2.36@33.236,56.805 34.515,56.805 v1(34.607,56.713) ; R22.1@36.949,57.15 36.81,57.289 36.957,57.435 36.957,58.92 C9.1@36.949,58.928
  Bottom Layer w0.254: v1(34.607,56.713) 35.631,56.713 v1(36.957,58.039)
CURR_U: C3.1 R19.1 U2.24 | length 11.3
  Top Layer w0.152: R19.1@19.05,50.046 C3.1@20.574,50.046 20.574,51.181 21.209,51.816 27.089,51.816 27.436,52.163 U2.24@27.436,53.505
CURR_V: C5.1 R20.1 U2.25 | length 8.5
  Top Layer w0.152: R20.1@22.225,50.046 C5.1@23.749,50.046 23.749,50.927 24.384,51.562 27.452,51.562 27.936,52.046 U2.25@27.936,53.505
CURR_W: C2.1 R18.1 U2.26 | length 5.6
  Top Layer w0.152: R18.1@25.399,50.046 C2.1@26.923,50.046 26.923,50.672 28.436,52.185 U2.26@28.436,53.505
FB: R39.1 R41.2 U9.7 | length 5.6
  Top Layer w0.152: R41.2@13.462,39.894 R39.1@14.986,39.894 15.011,39.894 15.4,40.283 15.4,40.308 15.621,40.529 15.621,42.418 15.244,42.795 U9.7@14.529,42.795
GND: C2.2 C3.2 C4.2 C5.2 C6.2 C7.2 C8.2 C9.2 C10.2 C28.2 C29.2 C30.2 C31.2 C32.2 C33.2 C34.2 C35.2 C36.2 C37.2 C38.2 C40.2 C41.2 C42.2 C43.2 C44.2 C45.2 C46.1 C47.1 C48.1 C49.1 C50.2 C51.1 C52.1 C53.1 C54.1 C55.2 C56.2 C57.2 C58.2 C59.2 C60.2 C61.2 C62.2 C63.2 C64.2 C65.2 C68.2 C69.2 C70.2 C71.2 D2.1 D11.1 D12.1 D13.3 D21.1 D22.1 J3.2 J4.2 J5.2 R5.1 R16.1 R41.1 R42.1 R44.1 R47.2 R49.1 R51.2 U2.15 U2.27 U2.31 U2.47 U2.63 U3.2 U4.5 U5.2 U5.7 U6.2 U6.7 U7.2 U7.7 U8.2 U8.3 U8.7 U9.0 U9.9 U10.2 U11.1 U12.2 X1.2 X1.4 | length 199.9
  Top Layer w0.152: U9.0@12.446,43.307 13.256,43.77 14.155,43.77 U9.9@14.529,43.819 ; v1(15.954,66.688) 16.068,66.802 C57.2@17.137,66.802 ; X1.4@18.58,62.933 18.55,62.963 C51.1@18.55,64.881 19.542,64.881 v1(19.558,64.897) ; D22.1@21.141,70.993 v1(21.971,70.993) ; C58.2@21.717,68.08 22.725,68.08 v1(22.86,67.945) ; v1(23.495,70.104) 24.257,69.342 R49.1@25.146,69.342 R51.2@25.146,70.985 23.63,70.985 v1(23.583,70.938) ; v1(27.82,70.699) 27.94,70.579 U3.2@27.94,68.822 ; v1(30.434,72.021) 30.361,72.094 30.412,72.144 C64.2@31.877,72.144 ; v1(34.671,66.929) 35.052,67.31 C55.2@36.449,67.31 C60.2@38.1,67.31 ; C9.2@38.489,58.928 39.37,58.928 v1(39.751,58.547) ; v1(39.37,64.516) 39.251,64.516 C56.2@38.489,63.754 C8.2@38.489,62.23 39.359,62.23 40.159,63.03 D2.1@40.259,63.03 41.309,63.03 v1(41.352,63.073)
  Top Layer w0.254: v1@9.314,58.928 v1(9.346,58.96) ; v1(14.845,70.03) 14.845,70.724 D21.1@15.114,70.993 ; R16.1@44.831,33.647 46.154,33.647 v1(46.186,33.615)
  Top Layer w0.305: R47.2@4.691,58.801 4.691,57.443 v1(4.744,57.39) ; U10.2@8.175,58.928 v1@9.314,58.928 ; v1(8.41,38.366) 8.43,38.346 C28.2@9.906,38.346 9.914,38.354 R41.1@13.462,38.354 v1(13.462,37.338) ; v1(13.269,73.602) 13.269,75.098 J5.2@13.355,75.184 ; C38.2@17.137,41.529 17.137,40.339 v1(17.209,40.267) ; C37.2@18.677,44.831 18.677,45.728 v1(18.796,45.847) ; C3.2@20.574,48.506 20.574,47.521 v1(20.695,47.4) ; U2.15@22.136,55.805 23.841,55.805 v1(23.947,55.911) ; C54.1@22.733,43.307 22.758,43.307 23.356,43.905 23.356,43.93 23.571,44.145 U12.2@24.511,44.145 25.711,44.145 v1(25.752,44.104) ; v1(23.704,47.131) 23.749,47.176 C5.2@23.749,48.506 ; v1(24.384,62.865) 24.436,62.917 U2.63@24.436,64.605 ; v1(26.857,47.117) 26.857,48.44 C2.2@26.923,48.506 C63.2@28.575,48.506 ; v1(26.976,44.113) 27.634,44.113 C53.1@28.448,43.299 ; U2.27@28.936,53.505 28.936,55.733 v1(28.956,55.753) ; U2.31@30.936,53.505 30.936,55.828 v1(30.988,55.88) ; v1(31.303,62.181) 31.426,62.305 U2.47@33.236,62.305
  Top Layer w0.508: v1(4.445,54.737) C43.2@6.257,54.737 ; v1(6.34,56.315) 6.257,56.232 C43.2@6.257,54.737 ; v1(7.493,54.737) C43.2@6.257,54.737 ; v1(12.901,54.816) 12.98,54.737 C44.2@14.063,54.737 ; v1(14.003,53.359) 14.063,53.419 C44.2@14.063,54.737 ; v1(15.152,53.791) 15.009,53.791 C44.2@14.063,54.737 ; v1(15.353,54.793) 15.296,54.737 C44.2@14.063,54.737 ; v1(15.498,52.561) 15.498,52.193 D11.1@16.256,51.435 ; v1(15.748,60.833) 15.848,60.733 X1.2@16.98,60.733 16.995,60.718 16.995,57.149 C50.2@17.01,57.134 16.152,57.134 v1(16.023,57.262) ; v1(15.954,54.014) 16.042,54.102 C59.2@17.01,54.102 ; v1(16.256,52.705) D11.1@16.256,51.435 ; v1(17.907,52.121) 17.717,51.931 16.752,51.931 D11.1@16.256,51.435 ; J3.2@39.196,75.234 39.196,73.961 v1(39.497,73.66)
  Top Layer w0.762: v1(2.477,41.421) 2.716,41.182 C31.2@3.683,41.182 ; v1(3.306,66.781) 3.319,66.768 C40.2@5.334,66.768 C41.2@7.493,66.768 ; v1(3.324,47.57) 3.324,48.502 C30.2@3.683,48.861 ; v1(3.414,37.331) 3.463,37.38 C32.2@3.463,38.989 ; v1(3.668,42.336) 3.683,42.322 C31.2@3.683,41.182 ; v1(3.71,50.702) 3.683,50.675 C30.2@3.683,48.861 ; v1(4.281,38.96) 4.253,38.989 C32.2@3.463,38.989 ; R42.1@6.342,41.148 6.63,41.436 v1(6.63,41.982) ; v1(6.55,50.182) 6.55,48.983 C36.2@6.604,48.929 6.604,47.691 v1(6.56,47.647) ; v1(7.493,68.072) C41.2@7.493,66.768 ; v1(7.882,45.847) 7.882,45.872 9.017,47.007 C33.2@9.017,48.929 ; C42.2@9.779,66.768 C41.2@7.493,66.768 ; C42.2@10.114,66.768 10.298,66.584 10.298,66.527 10.744,66.081 D12.1@12.827,66.081 ; v1(11.049,50.165) 11.303,49.911 C34.2@11.303,48.929 ; v1(13.242,67.811) 12.827,67.397 D12.1@12.827,66.081 ; v1(13.335,50.165) C35.2@13.335,48.929 13.301,48.895 3.717,48.895 C30.2@3.683,48.861 ; v1(14.732,65.913) 14.564,66.081 D12.1@12.827,66.081 ; C32.2@3.463,38.989 3.463,39.324 3.683,39.544 C31.2@3.683,41.182
  Bottom Layer w0.152: v1(28.563,71.229) 28.583,71.209 28.524,71.15 28.524,70.582 28.702,70.404 D13.3@28.702,69.98
  Bottom Layer w0.254: U8.2@9.136,19.558 U8.3@9.136,20.828 11.006,20.828 11.768,21.59 v1(12.954,21.59) ; U8.7@14.486,19.558 14.917,19.558 15.316,19.159 15.316,18.838 15.616,18.539 15.616,17.734 16.84,16.51 v1(18.923,16.51) ; v1(15.748,70.485) 15.748,70.478 16.051,70.175 U4.5@16.051,68.969 ; v1(18.409,11.846) 18.415,11.852 C71.2@18.415,13.462 ; U5.2@24.257,7.477 24.257,6.952 24.862,6.347 26.159,6.347 v1(26.162,6.35) ; U5.7@24.257,12.827 24.257,13.352 24.862,13.957 25.778,13.957 26.253,13.482 v1(26.253,13.447) ; C69.2@27.432,12.438 28.404,12.438 v1(28.421,12.454) ; C10.2@27.686,7.374 27.686,8.796 v1(27.843,8.952) ; U7.2@32.258,7.485 32.258,6.96 32.863,6.355 33.779,6.355 34.133,6.709 34.133,6.985 34.395,7.247 C7.2@35.179,7.247 35.179,8.636 v1(35.052,8.763) ; U7.7@32.258,12.835 32.324,12.901 32.324,13.655 32.634,13.965 33.779,13.965 34.211,13.532 34.211,13.38 v1(34.26,13.332) ; v1(34.26,13.332) 35.027,12.565 C70.2@35.052,12.565 ; U6.2@39.37,7.477 39.37,6.952 39.988,6.334 v1(41.031,6.334) ; U6.7@39.37,12.827 39.37,13.258 39.84,13.728 40.161,13.728 40.389,13.957 40.916,13.957 41.245,13.628 41.245,13.531 41.372,13.404 v1(41.372,13.335) 41.42,13.286 41.545,13.286 42.266,12.565 C4.2@42.291,12.565 ; v1(42.291,8.509) 42.561,8.779 C68.2@43.942,8.779 43.95,8.787 C6.2@45.466,8.787
  Bottom Layer w0.305: v1(8.509,75.057) 8.509,74.169 U11.1@8.534,74.144 ; v1(10.023,75.184) 10.023,74.575 C49.1@10.287,74.311 ; v1(10.278,68.407) 10.287,68.415 C47.1@10.287,69.588 C46.1@11.811,69.588 11.811,68.408 v1(11.799,68.396) ; C62.2@28.575,48.506 C61.2@30.099,48.506 30.107,48.514 v1(31.496,48.514)
  Bottom Layer w0.508: U11.1@8.534,74.144 8.618,74.227 11.727,74.227 C48.1@11.811,74.311 ; J4.2@17.192,75.234 17.338,75.38 17.338,76.393 v1(17.399,76.454)
  Bottom Layer w0.7: v3(18.542,38.608) 18.602,38.668 19.152,38.668 19.345,38.862 v3(19.431,38.862) 20.693,40.124 R5.1@20.693,41.402
  Bottom Layer w0.762: C65.2@21.336,68.191 22.614,68.191 v1(22.86,67.945) ; v1(45.085,60.579) C45.2@46.194,60.579 ; v1(46.209,59.346) 46.194,59.346 C45.2@46.194,60.579 ; v1(47.419,60.541) ccw(c47.381,60.541) 47.381,60.579 C45.2@46.194,60.579
  other v2: 11.938,42.672 12.827,42.672 11.938,43.18 12.827,43.18 12.368,43.643 12.827,43.815
LED_0: D1.2 U2.3 | length 26.1
  Top Layer w0.152: U2.3@22.136,61.805 29.442,61.805 30.629,62.992 31.144,62.992 32.701,64.549 32.701,66.036 34.948,68.282 37.294,68.282 37.719,68.707 41.529,68.707 42.799,69.977 D1.2@42.799,71.112
LED_1: D3.2 U2.4 | length 26.5
  Top Layer w0.152: U2.4@22.136,61.305 29.301,61.305 30.685,62.689 31.2,62.689 32.955,64.444 32.955,65.931 35.053,68.029 37.549,68.029 37.973,68.453 40.64,68.453 41.529,67.564 41.529,66.167 42.164,65.532 D3.2@42.799,65.532
MCU_CAN_N: U2.58 U3.4 | length 6.6
  Top Layer w0.152: U2.58@26.936,64.605 26.936,66.71 27.56,67.334 29.366,67.334 29.968,67.936 30.273,67.936 30.627,68.29 U3.4@30.627,68.473
MCU_CAN_P: U2.59 U3.1 | length 3.7
  Top Layer w0.152: U2.59@26.436,64.605 26.436,66.679 26.729,66.972 26.729,67.621 U3.1@26.729,68.169
MU_OUT: C11.2 D14.2 Q1.1 Q4.5 R9.2 R25.1 U1.18 U6.8 | length 35
  Top Layer w0.152: v1@38.1,11.324 R25.1@38.1,12.858
  Top Layer w0.305: U1.18@41.946,46.347 43.221,46.347 43.352,46.477 v2@43.434,46.477
  VCC w0.305: v2(38.1,33.909) 38.1,40.961 43.167,46.027 43.167,46.469 v2(43.18,46.482)
  Bottom Layer w0.152: v1(38.1,11.519) 39.693,11.519 40.33,12.157 40.401,12.157 40.64,12.396 U6.8@40.64,12.827
  Bottom Layer w0.254: v2(38.1,33.909) 38.1,30.062 38.317,29.845 D14.2@38.317,27.051 ; R9.2@38.219,29.845 38.219,27.149 D14.2@38.317,27.051 ; v1(38.989,24.257) 38.989,26.379 D14.2@38.317,27.051
  Bottom Layer w0.305: C11.2@42.164,46.609 42.291,46.482 v2(43.18,46.482)